# Altium PCB maxwell_dev_board.PcbDoc
Units mm, origin at the board's own origin, x right, y up, seen from the top; angles counter-clockwise.
Board outline 18 x 32 mm, 2 copper layers (Top Layer, Bottom Layer); 12 components, 9 nets, 23 pads, 0 vias.
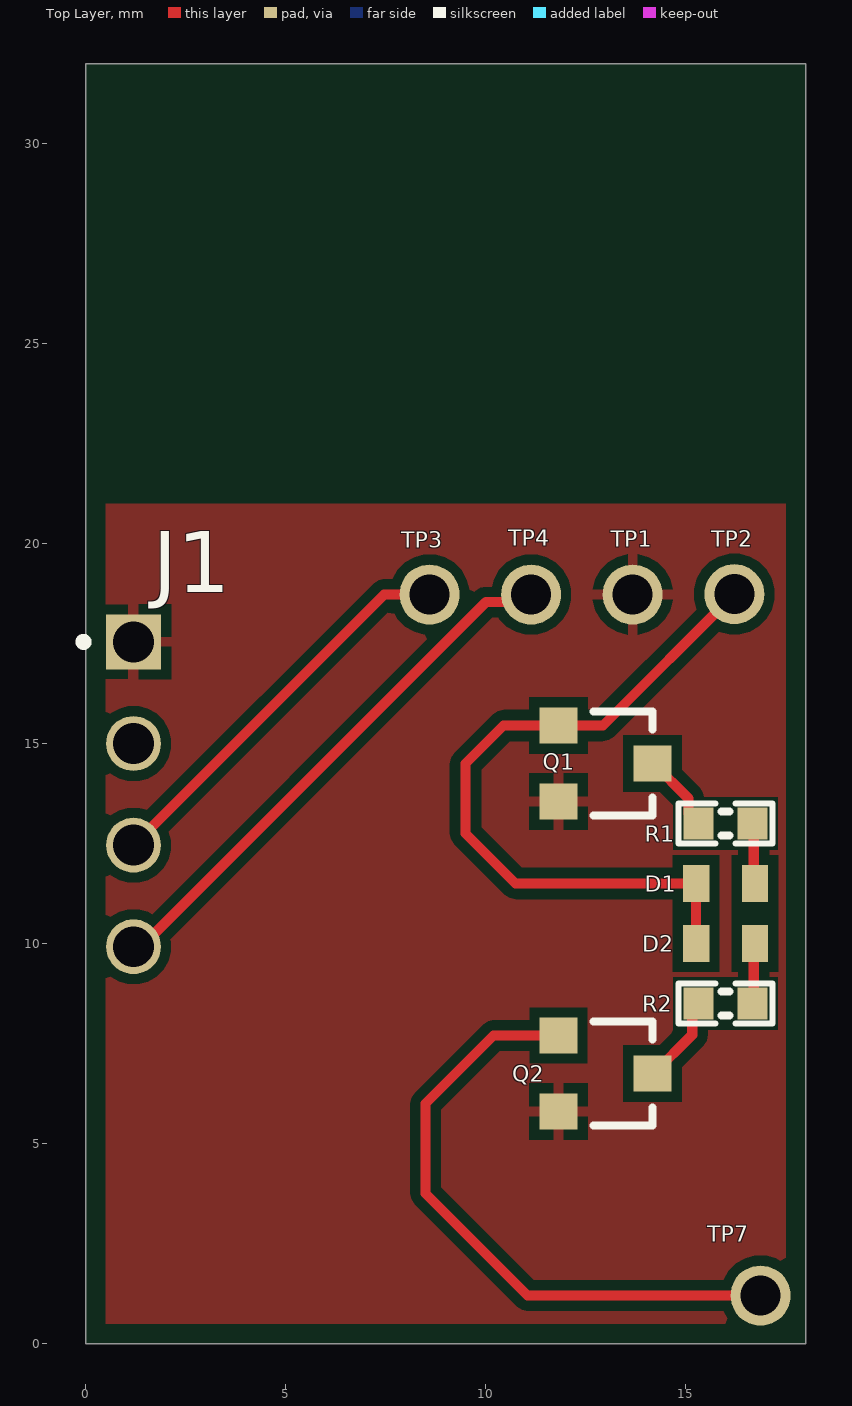
[diagram p0: Top Layer view]
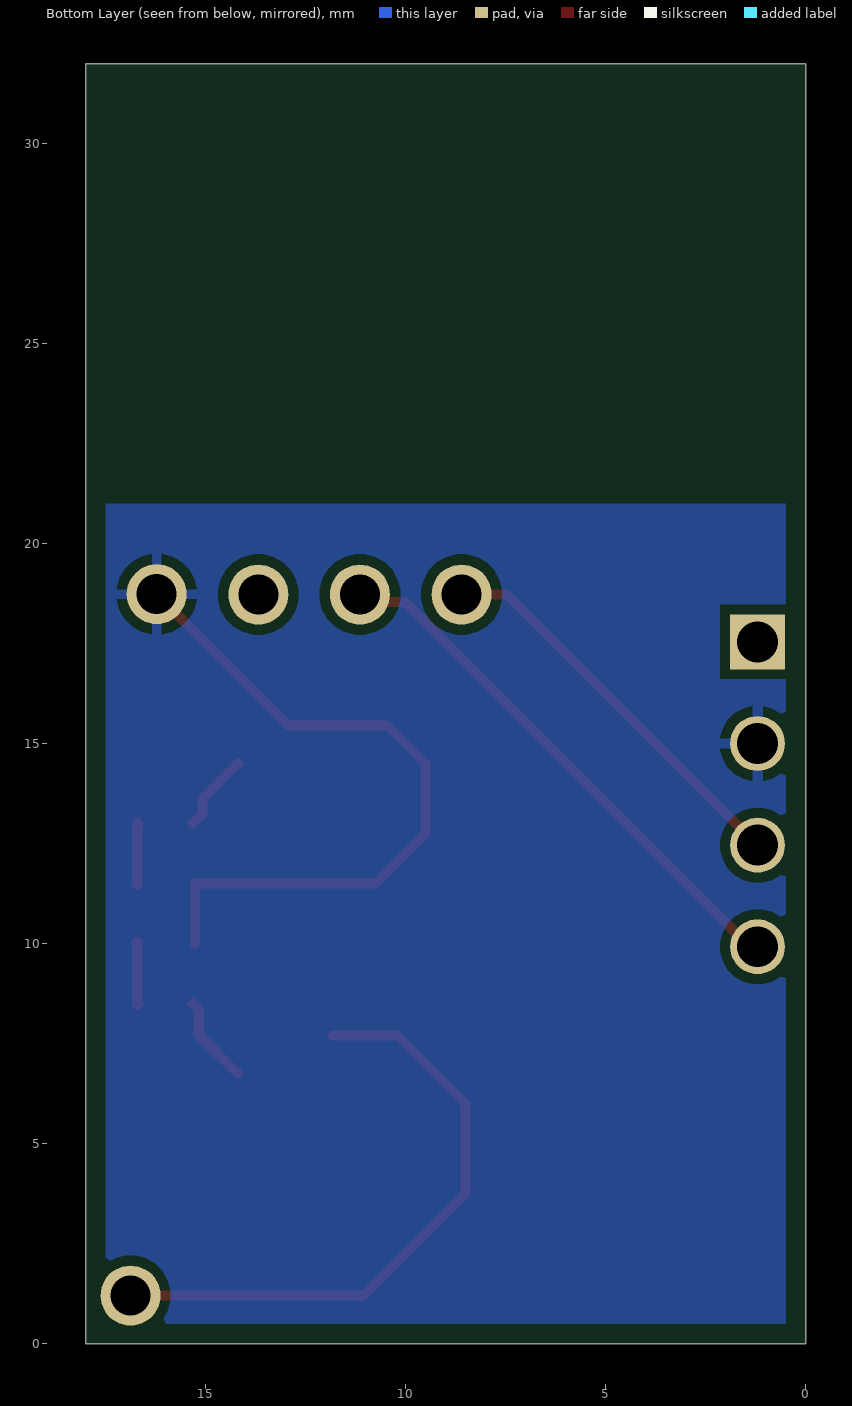
[diagram p1: Bottom Layer view, seen from below]

## Layer stack, top to bottom
Top Solder: solder mask 0.01, Solder Resist, Dk 3.5
Top Layer: signal copper 0.035
Dielectric 1: dielectric 0.32, FR-4, Dk 4.8
Bottom Layer: signal copper 0.035
Bottom Solder: solder mask 0.01, Solder Resist, Dk 3.5

## Board outline
0,0 18,0 18,32 0,32

## Design rules (kind name [scope] priority, off if disabled: settings)
Clearance [All] p1: gap=0.254 ignorepadtopadclearanceinfootprint=FALSE except(0: Arc-Hole Track-Hole SMDPad-Hole THPad-Hole Via-Hole Fill-Hole Poly-Hole Region-Hole Text-Hole)
PolygonConnect [All] p1: connectstyle=Relief reliefconductorwidth=0.254 reliefentries=4 polygonreliefangle="90 Angle" airgapwidth=0.254
RoutingVias [All] p1: holewidth=0.711 width=1.27 viastyle="Through Hole" minholewidth=0.711 minwidth=1.27 maxholewidth=0.711 maxwidth=1.27
SolderMaskExpansion [All] p1: expansion=0.102 istentingtop=FALSE
Width [All] p1: maxlimit=0.254 minlimit=0.254 preferedwidth=0.254
30 further rules are at their usual default settings.

## Components (designator, comment, footprint, x,y, rotation, side; value= is the part's Value field where it differs from the comment)
D1 "LED" LED_0603 16,11.5 r0 top
D2 "LED" LED_0603 16,10 r0 top
J1 "CONN-4POS" 4_PIN_HEADER 1.2,17.54 r90 top
Q1 "MOSFET-N" SOT-23 13,14.5 r270 top
Q2 "MOSFET-N" SOT-23 13,6.75 r270 top
R1 "220" RES0603 16,13 r0 top value=1k
R2 "220" RES0603 16,8.5 r0 top value=1k
TP1 "TEST_PIN" TEST_PIN#1 44,3 r0 top
TP2 "TEST_PIN" TEST_PIN#2 38,3 r90 top
TP3 "TEST_PIN" TEST_PIN#3 32,3 r90 top
TP4 "TEST_PIN" TEST_PIN#4 26,3 r90 top
TP7 "TEST_PIN" TEST_PIN#5 21,3 r90 top

## Footprints (in the part's own frame and the unit in brackets; to place one, negate y for a bottom-side part, rotate by r counter-clockwise, add the part's x,y. Pads: shape width x height; smd on the part's side, far side on the other; paste and mask are expansions set on the pad)
4_PIN_HEADER [mm]
  rect 1.37x1.37 hole 1.02: 1(0,0)
  round 1.37 hole 1.02: 2(-2.54,0) 3(-5.08,0) 4(-7.62,0)
  silkscreen extent -0.1,1.15 0.1,1.35, body extent -8.83,-0.34 1.33,9.88, height 1.27
LED_0603 [mil]
  rect 26x36 smd: 1(-29,0) 2(29,0)
  body extent -34,-18 34,18, height 36
RES0603 [mm]
  rect 0.75x0.8 smd: 1(-0.675,0) 2(0.675,0)
  silkscreen extent -1.17,-0.5 1.17,0.5, body extent -0.8,-0.43 0.8,0.43, height 0.8
SOT-23 [mm] "SOT-23; 3 Leads; Body 3.1 x 2.5 mm, inc. leads (LxW max)"
  rect 0.9x0.95 smd: 1(-0.95,-1.175) 2(0.95,-1.175) 3(0,1.175)
  silkscreen extent -1.3,-0.3 1.3,1.18, body extent -1.45,-0.65 1.45,0.65, height 0.95
TEST_PIN#1 [mm] "hole for test pins"
  round 1.5 hole 1: 1(-30.32,15.725)
TEST_PIN#2 [mm] "hole for test pins"
  round 1.5 hole 1: 1(15.735,21.78)
TEST_PIN#3 [mm] "hole for test pins"
  round 1.5 hole 1: 1(15.725,23.4)
TEST_PIN#4 [mm] "hole for test pins"
  round 1.5 hole 1: 1(15.725,14.86)
TEST_PIN#5 [mm] "hole for test pins"
  round 1.5 hole 1: 1(-1.8,4.125)

## Part data
D1: "Default Diode", PartNumber=3372-0603GBD0790S01TR-ND, Code_JEDEC=DO-214-AB, LatestRevisionDate=17-Jul-2002, LatestRevisionNote="Re-released for DXP Platform.", PackageDescription="DO-214-AB/SMC; 2 C-Bend Leads; Body 7.9 x 5.9 mm, inc. leads (LxW)", PackageReference=SMC, PackageVersion=Sep-1996, Published=8-Jun-2000, Publisher="Altium Limited"
D2: "Default Diode", Code_JEDEC=DO-214-AB, LatestRevisionDate=17-Jul-2002, LatestRevisionNote="Re-released for DXP Platform.", PackageDescription="DO-214-AB/SMC; 2 C-Bend Leads; Body 7.9 x 5.9 mm, inc. leads (LxW)", PackageReference=SMC, PackageVersion=Sep-1996, Published=8-Jun-2000, Publisher="Altium Limited"
Q1 Q2: "N-Channel MOSFET", LatestRevisionDate=17-Jul-2002, LatestRevisionNote="Re-released for DXP Platform.", PackageDescription="TO, Flat Index; 3 In-Line, Axial Leads; Body Dia. 4.6mm; Lead Dia. 0.5 mm (max)", PackageReference=E3, PackageVersion=1995/1996, Published=8-Jun-2000, Publisher="Altium Limited"
R1 R2: "Chip Resistor", Publisher=HabitAware

## Nets (pads, with @x,y where several pads share a name; then routed paths per layer and width w, separated by ;. In a path a pad name is that pad's centre, name@x,y a point inside that pad or via, vN(x,y) a via of type N, cw(c..) or ccw(c..) an arc to the next point about the centre after c; other vN are vias at no path point)
3v3: D1.1 D2.1 J1.2 Q1.1 TP2.1 | length 18
  Top Layer w0.254: D2.1 D1.1 10.75,11.5 9.5,12.75 9.5,14.5 10.45,15.45 Q1.1 12.935,15.45 TP2.1
3v3_SHDN: Q2.1 TP7.1 | length 15.7
  Top Layer w0.254: Q2.1 10.2,7.7 8.5,6 8.5,3.75 11.05,1.2 TP7.1
GND: J1.1 Q1.2 Q2.2 TP1.1
NetD1_2: D1.2 R1.2 | length 1.6
  Top Layer w0.254: R1.2@16.706,13.031 R1.2 16.706,12.969 16.706,11.469 D1.2
NetD2_2: D2.2 R2.2 | length 1.6
  Top Layer w0.254: R2.2@16.706,8.469 R2.2 16.706,8.531 16.706,9.969 D2.2 D2.2@16.706,10.031
NetQ1_3: Q1.3 R1.1 | length 2
  Top Layer w0.254: Q1.3 14.2,14.5 15.077,13.623 15.077,13.248 R1.1
NetQ2_3: Q2.3 R2.1 | length 2.2
  Top Layer w0.254: Q2.3 14.2,6.75 15.169,7.719 15.169,8.344 R2.1
SWDCLK: J1.3 TP3.1 | length 10
  Top Layer w0.254: J1.3 7.465,18.725 TP3.1
SWDIO: J1.4 TP4.1 | length 13.6
  Top Layer w0.254: J1.4 1.394,9.92 10.009,18.535 10.95,18.535 TP4.1

## Polygon pours and split planes (outlines as drawn)
3v3 on Bottom Layer "3V3_L02_P001" (solid, pour order 1): 0.5,21 17.5,21 17.5,0.5 0.5,0.5
GND on Top Layer "GND_L01_P000" (solid, pour order 0): 0.5,0.5 0.5,21 17.5,21 17.5,0.5

## Silkscreen, mask and mechanical layers (free items; w line width, h text height)
Mechanical 1:
  the board outline again, w0.254